# EAGLE board usb_tester (EAGLE 6.3)
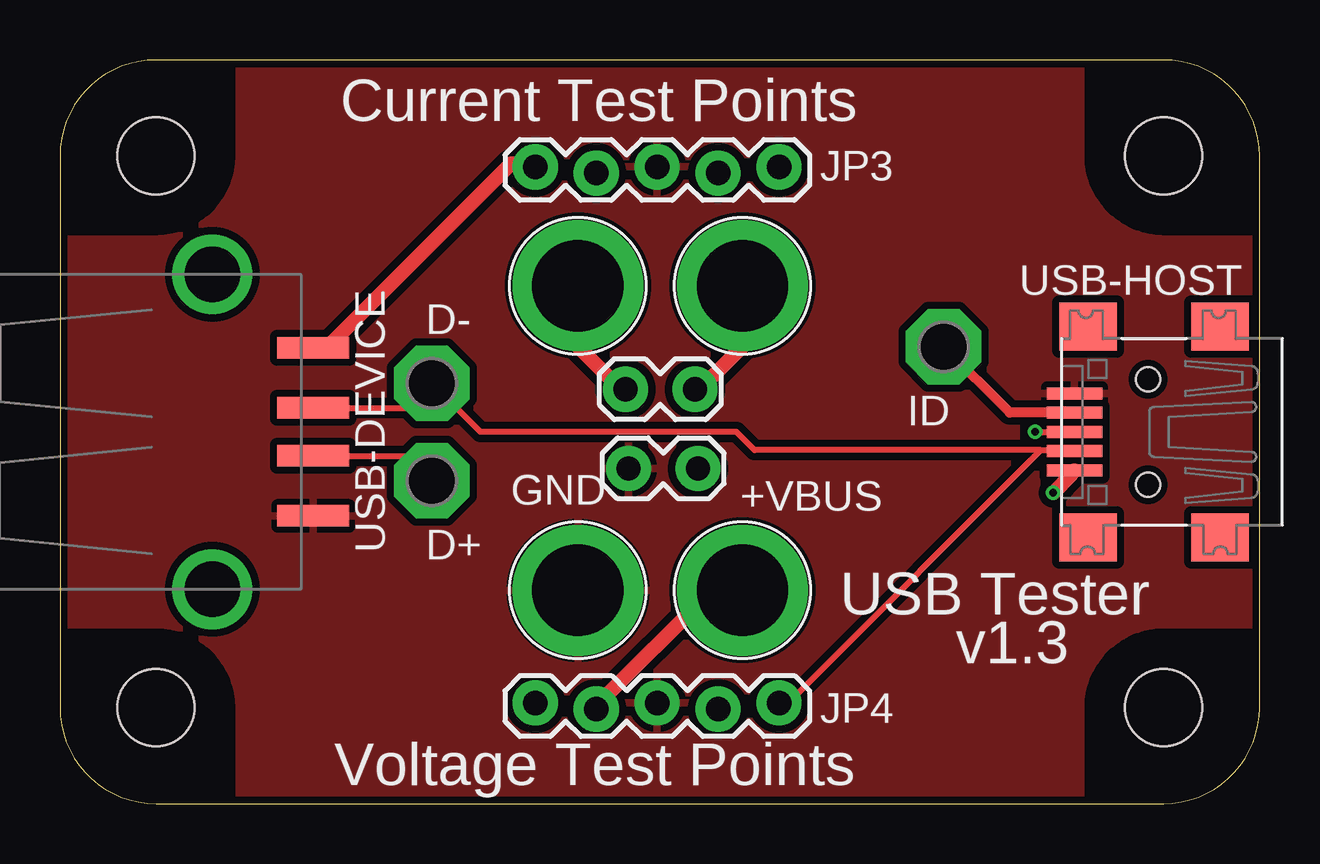
[diagram p0: board, top side]
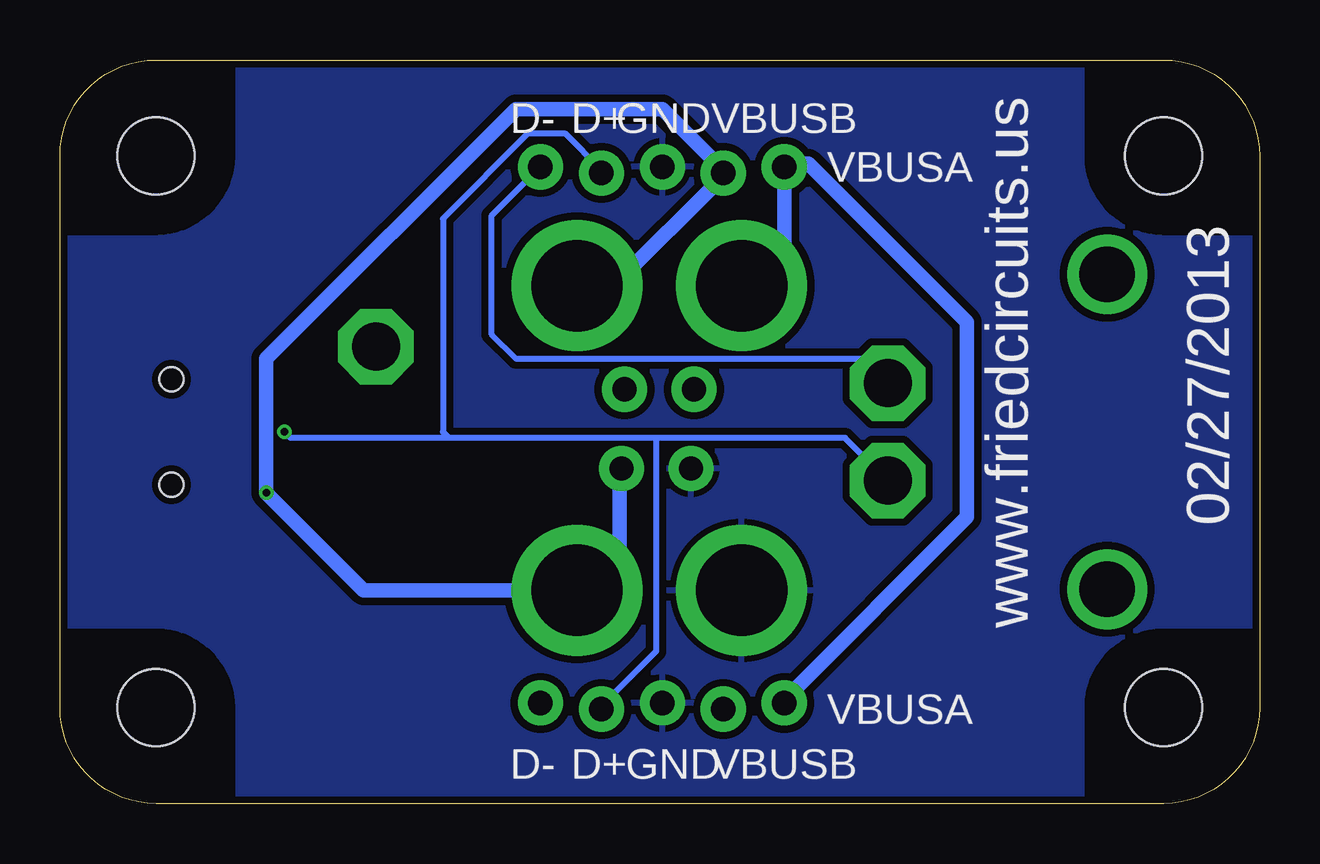
[diagram p1: board, bottom side, seen from below]

Size 50 x 31 mm. Coordinates in mm from the lower left corner, seen from the top.
Copper layers (1*16): Top 0.035mm / dielectric 1.5mm / Bottom 0.035mm
Design rules "Fusion_eagle_rule_v1.1": minimum track width 6mil, minimum drill 12mil, track to track 6mil, track to pad 6mil, pad to pad 6mil, via to via 6mil, smd to smd 0mil, copper to edge 10mil, drill to drill 10mil, minimum pad ring 10mil, minimum via ring 6mil, stop-mask expansion 2mil, vias tented up to drill 100mil, thermal gap 10mil
Net classes: 0 default: width 0.254 mm, drill 0.254 mm; 1 VBUS: width 0.61 mm, drill 0.254 mm

## Footprints (pad centres in the part's own frame; a part is rotated, then mirrored left to right if it is on the bottom)
P1-20 = drill 2.007 pad 3.15 octagon: TP 0,0
BANANA_CONN = drill 3.81 pad 5.461: P$1 0,0
1X02_LOCK = drill 1.016 pad 1.88: 1 -0.178,0; 2 2.718,0
1X05_LOCK = drill 1.016 pad 1.88: 1 0,0.127; 2 2.54,-0.127; 3 5.08,0.127; 4 7.62,-0.127; 5 10.16,0.127
DP5031_V1 = hole 3.2: 4,4; 46,4; 46,27; 4,27
USB-A-S-NOSILK-FEMALE = smd 3 x 0.9: D+ 4.212,-1; D- 4.212,1; GND 4.212,-3.5; VBUS 4.212,3.5 | drill 2.311: P$5 0,-6.566; P$6 0,6.566
USB-MINIB = smd 0.5 x 2.308: D+ 0,4.064; D- -0.8,4.064; GND 1.6,4.064; ID 0.8,4.064; VBUS -1.6,4.064 | smd 2 x 2.4: GND1 -4.4,-2; GND2 -4.4,3.5; GND3 4.4,3.5; GND4 4.4,-2 | hole 1: -2.2,1; 2.2,1

## Placement (x,y rotation side)
D+  PTR1PAD1-20  [P1-20]  15.49,13.46 0 top
D-  PTR1PAD1-20  [P1-20]  15.49,17.53 0 top
ID  PTR1PAD1-20  [P1-20]  36.83,19.05 0 top
J1  [BANANA_CONN]  28.45,8.89 0 top
J2  [BANANA_CONN]  21.59,8.89 0 top
J3  [BANANA_CONN]  21.59,21.59 0 top
J4  [BANANA_CONN]  28.45,21.59 0 top
JP1  [1X02_LOCK]  23.75,17.27 0 top
JP2  [1X02_LOCK]  26.42,13.97 180 top
JP3  [1X05_LOCK]  19.81,26.42 0 top
JP4  [1X05_LOCK]  19.81,4.06 0 top
PCB1  PCB_DP_RECTANGLE-31X50  [DP5031_V1]  0,0 0 top
U$1  FRAME_DINA4_L  [FC_CREDIT]  -2.54,-5.08 0 top  (outside the outline)
USB-DEVICE  USB-A-SMD  [USB-A-S-NOSILK-FEMALE]  6.35,15.49 0 top
USB-HOST  [USB-MINIB]  46.35,15.49 90 top

## Library data of the parts
D+ D- ID = testpad
J1-J4 JP3 JP4 = SparkFun-Connectors
JP1 JP2 = SparkFun-Passives
PCB1 = dp_devices; PCB_SIZE: DP5031_V1
U$1 = FriedCircuits; AUTHOR: William Garrido; FF1: fulfillment by; FF2: FriedCircuits; FF3: www.friedcircuits.us; PROJECT: USB Tester v1; URL1: http://; URL2: www.friedcircuits.us
USB-DEVICE = SparkFun-Connectors; PROD_ID: CONN-09520
USB-HOST = adafruit

## Nets
D+: D+.TP JP3.4 JP4.4 USB-DEVICE.D+ USB-HOST.D+
D-: D-.TP JP3.5 JP4.5 USB-DEVICE.D- USB-HOST.D-
GND: J2.P$1 JP2.2 JP3.3 JP4.3 USB-DEVICE.GND USB-HOST.GND
ID: ID.TP USB-HOST.ID
VBUSA [VBUS]: J3.P$1 JP1.1 JP3.1 JP4.1 USB-DEVICE.VBUS
VBUSB [VBUS]: J1.P$1 J4.P$1 JP1.2 JP2.1 JP3.2 JP4.2 USB-HOST.VBUS

## Tracks (layer width: path | path; a pad name or v marks a point on that pad's centre or on a via)
D+  (via drill 0.3)
  Top 0.254: v40.64,15.49 USB-HOST.D+ | USB-DEVICE.D+ 14.46,14.49 D+.TP
  Bottom 0.254: v40.64,15.49 40.39,15.24 33.78,15.24 | 25.15,15.24 17.27,15.24 D+.TP | 25.15,15.24 33.78,15.24 | 25.15,15.24 25.15,6.35 27.43,4.06 JP4.4 | JP3.4 27.43,26.42 28.96,27.94 30.48,27.94 34.04,24.38 34.04,15.49 33.78,15.24
D-
  Top 0.254: 40.89,14.73 42.16,14.73 USB-HOST.D- | 40.89,14.73 30.73,4.57 29.97,4.32 JP4.5 | 40.89,14.73 28.96,14.73 28.19,15.49 17.53,15.49 D-.TP 14.46,16.49 USB-DEVICE.D-
  Bottom 0.254: D-.TP 16.51,18.54 30.99,18.54 32,19.56 32,24.51 JP3.5
GND
  pour Top (isolate 0.305): 0,0 0,31.75 50.8,31.75 50.8,0
  pour Bottom (isolate 0.305): 0,0 50.8,0 50.8,31.75 0,31.75
  pour Bottom (isolate 0.305): 40.13,9.4 40.13,9.14 40.64,9.14
ID
  Top 0.406: USB-HOST.ID 39.59,16.29 ID.TP
VBUSA
  Top 0.61: JP3.1 19.81,26.67 18.8,26.67 11.18,19.05 11.43,19.05 USB-DEVICE.VBUS | J3.P$1 21.59,19.05 23.37,17.27 JP1.1
  Bottom 0.61: J3.P$1 19.81,21.59 JP3.1 19.68,26.67 18.8,26.67 12.19,20.07 12.19,11.94 19.81,4.32 JP4.1
VBUSB  (via drill 0.3)
  Top 0.61: v41.4,12.95 42.16,13.72 USB-HOST.VBUS | J1.P$1 27.18,8.89 22.35,4.06 JP4.2 | J4.P$1 28.45,19.05 26.67,17.27 JP1.2
  Bottom 0.61: J4.P$1 26.92,21.59 22.35,26.16 JP3.2 22.35,26.42 24.89,28.96 30.99,28.96 41.4,18.54 v41.4,12.95 37.34,8.89 J1.P$1 26.67,8.89 26.67,13.97 JP2.1

## Text on the board
tPlace: Current Test Points | +VBUS | GND | USB Tester | v1.3 | Voltage Test Points
bPlace: www.friedcircuits.us | GND | VBUSB | D+ | D- | VBUSA | 02/27/2013 | VBUSA | VBUSB | GND | D+ | D-